# Altium PCB MCU_PCB_backup.PcbDoc
Units mm, origin at the board's own origin, x right, y up, seen from the top; angles counter-clockwise.
Board outline 70 x 90 mm, 4 copper layers (Top Layer, Ground Plane, Power Plane, Bottom Layer), stack 0.844 mm thick; 21 components, 34 nets, 174 pads, 40 vias.
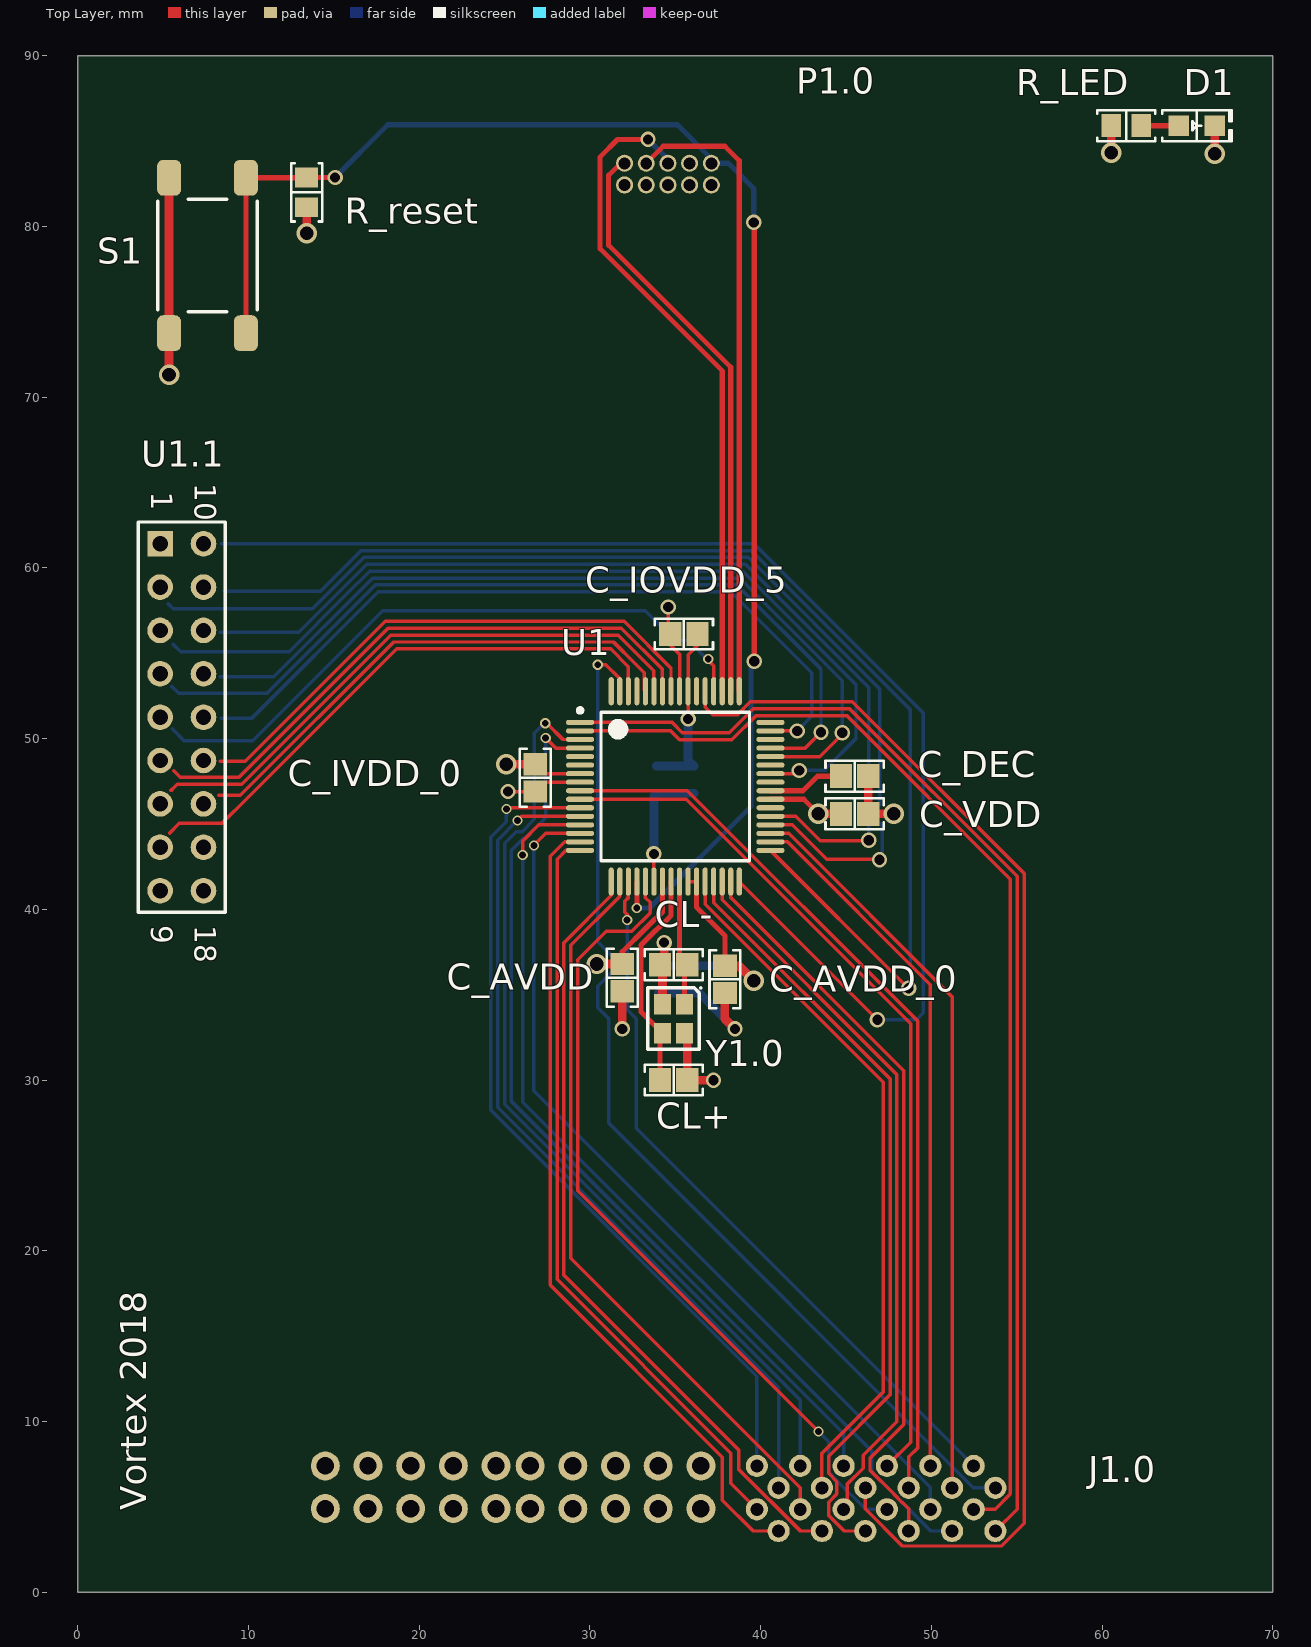
[diagram p0: Top Layer view]
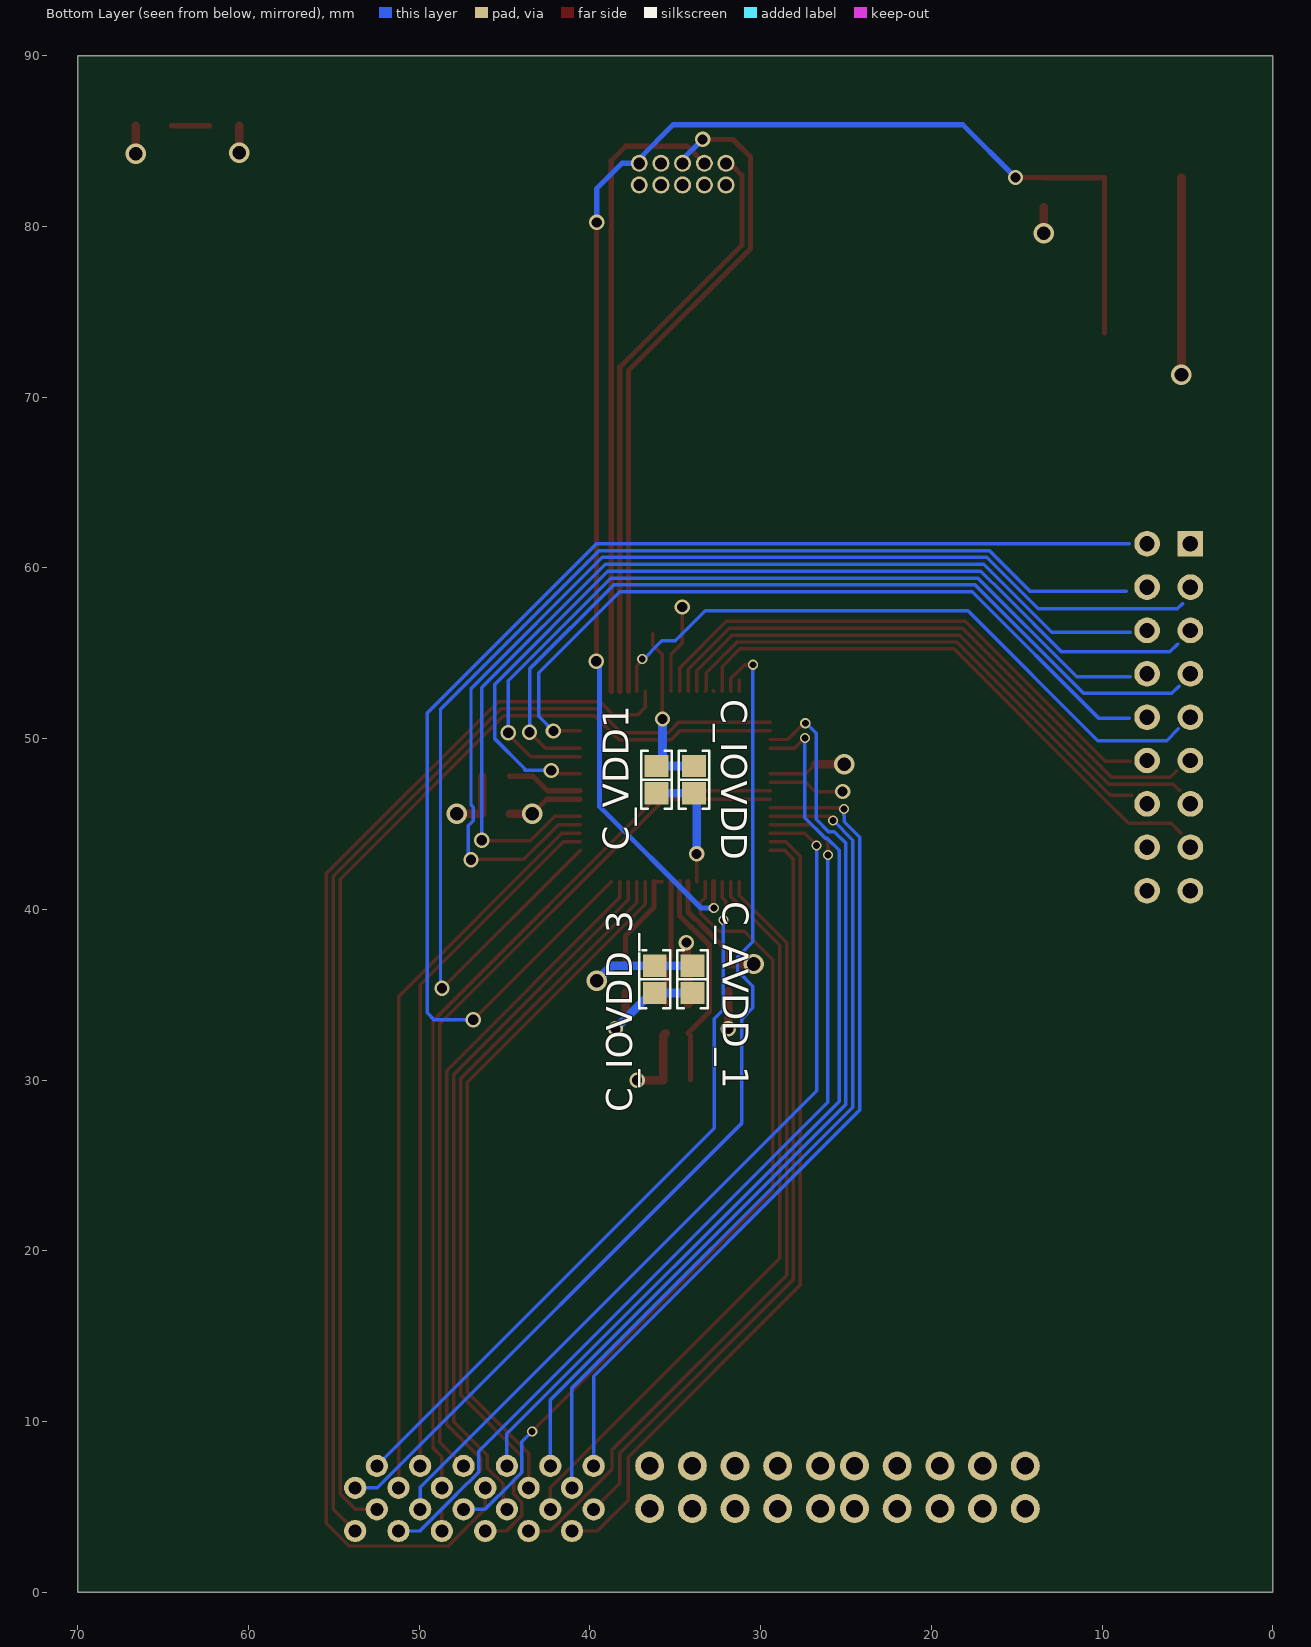
[diagram p1: Bottom Layer view, seen from below]
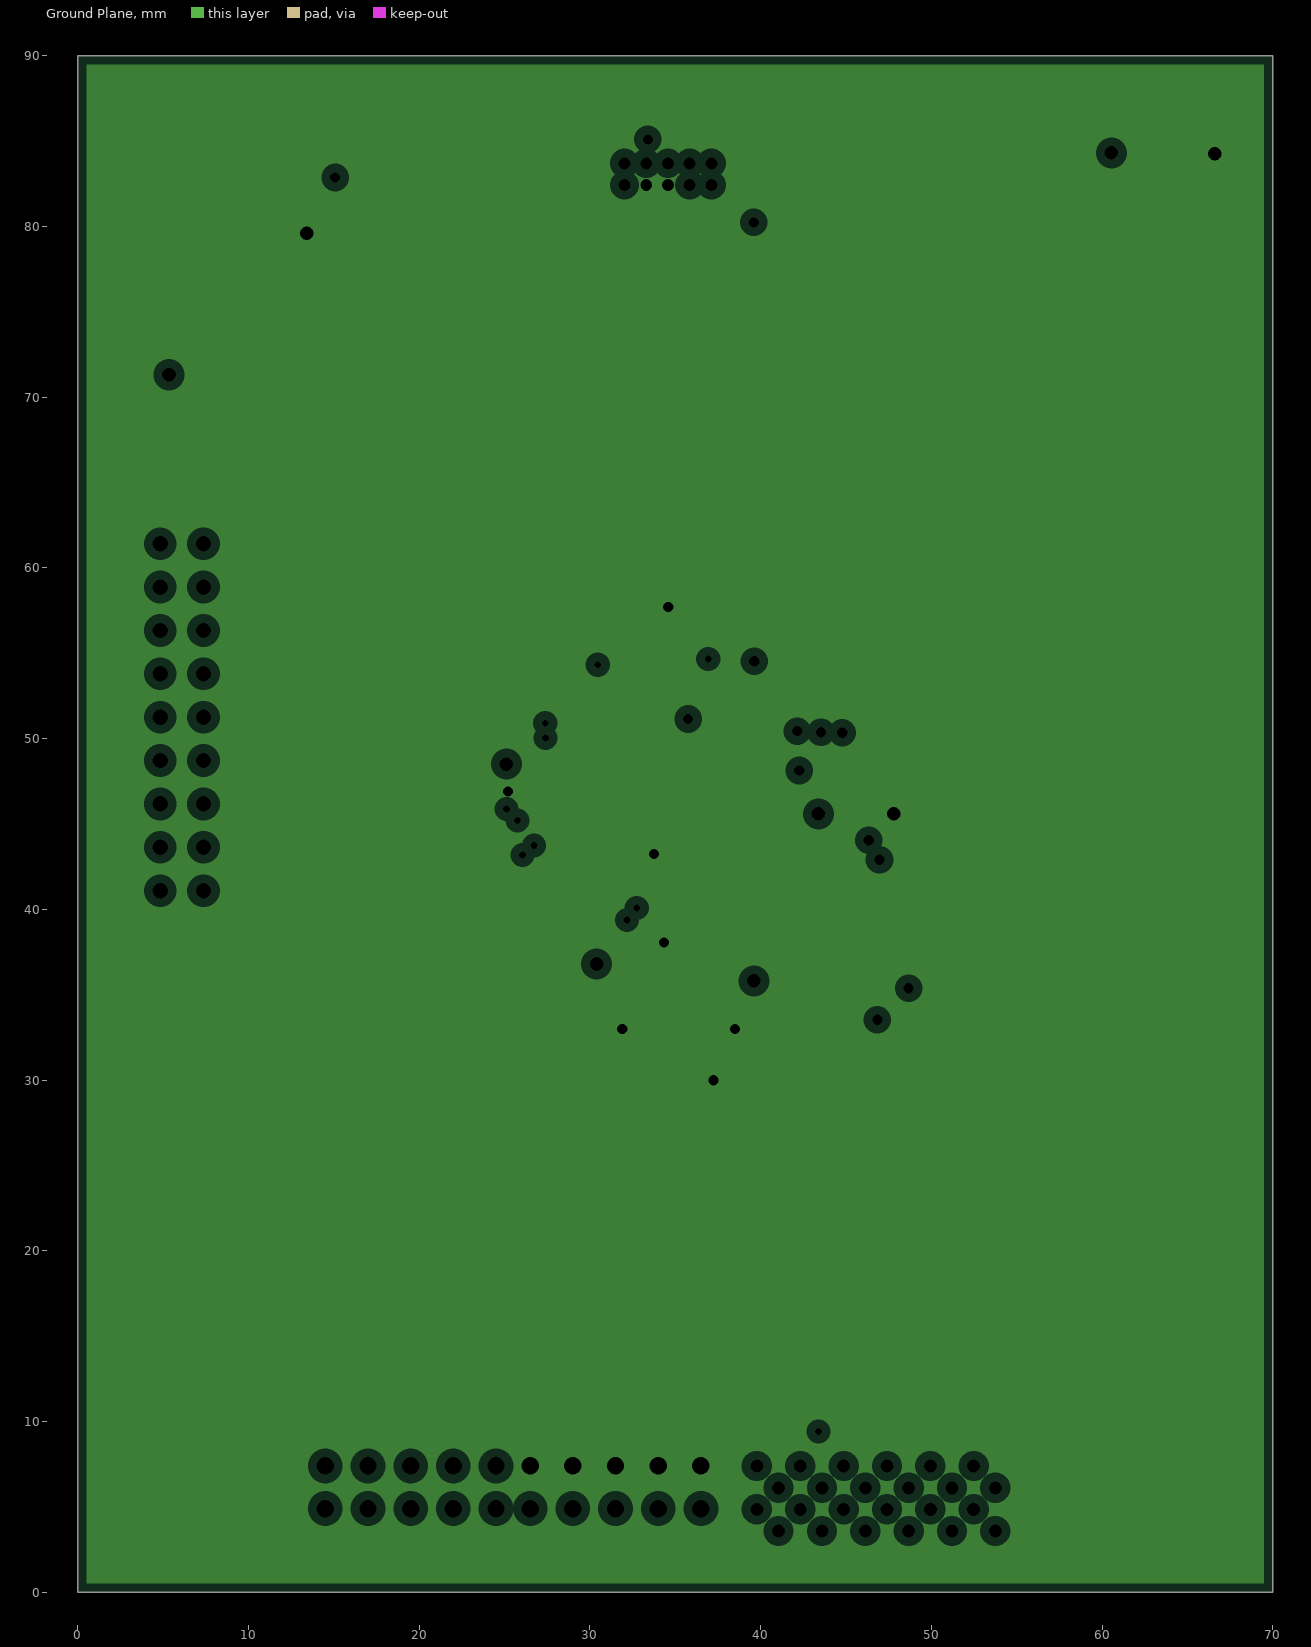
[diagram p2: Ground Plane, clearances drawn from the general rule]
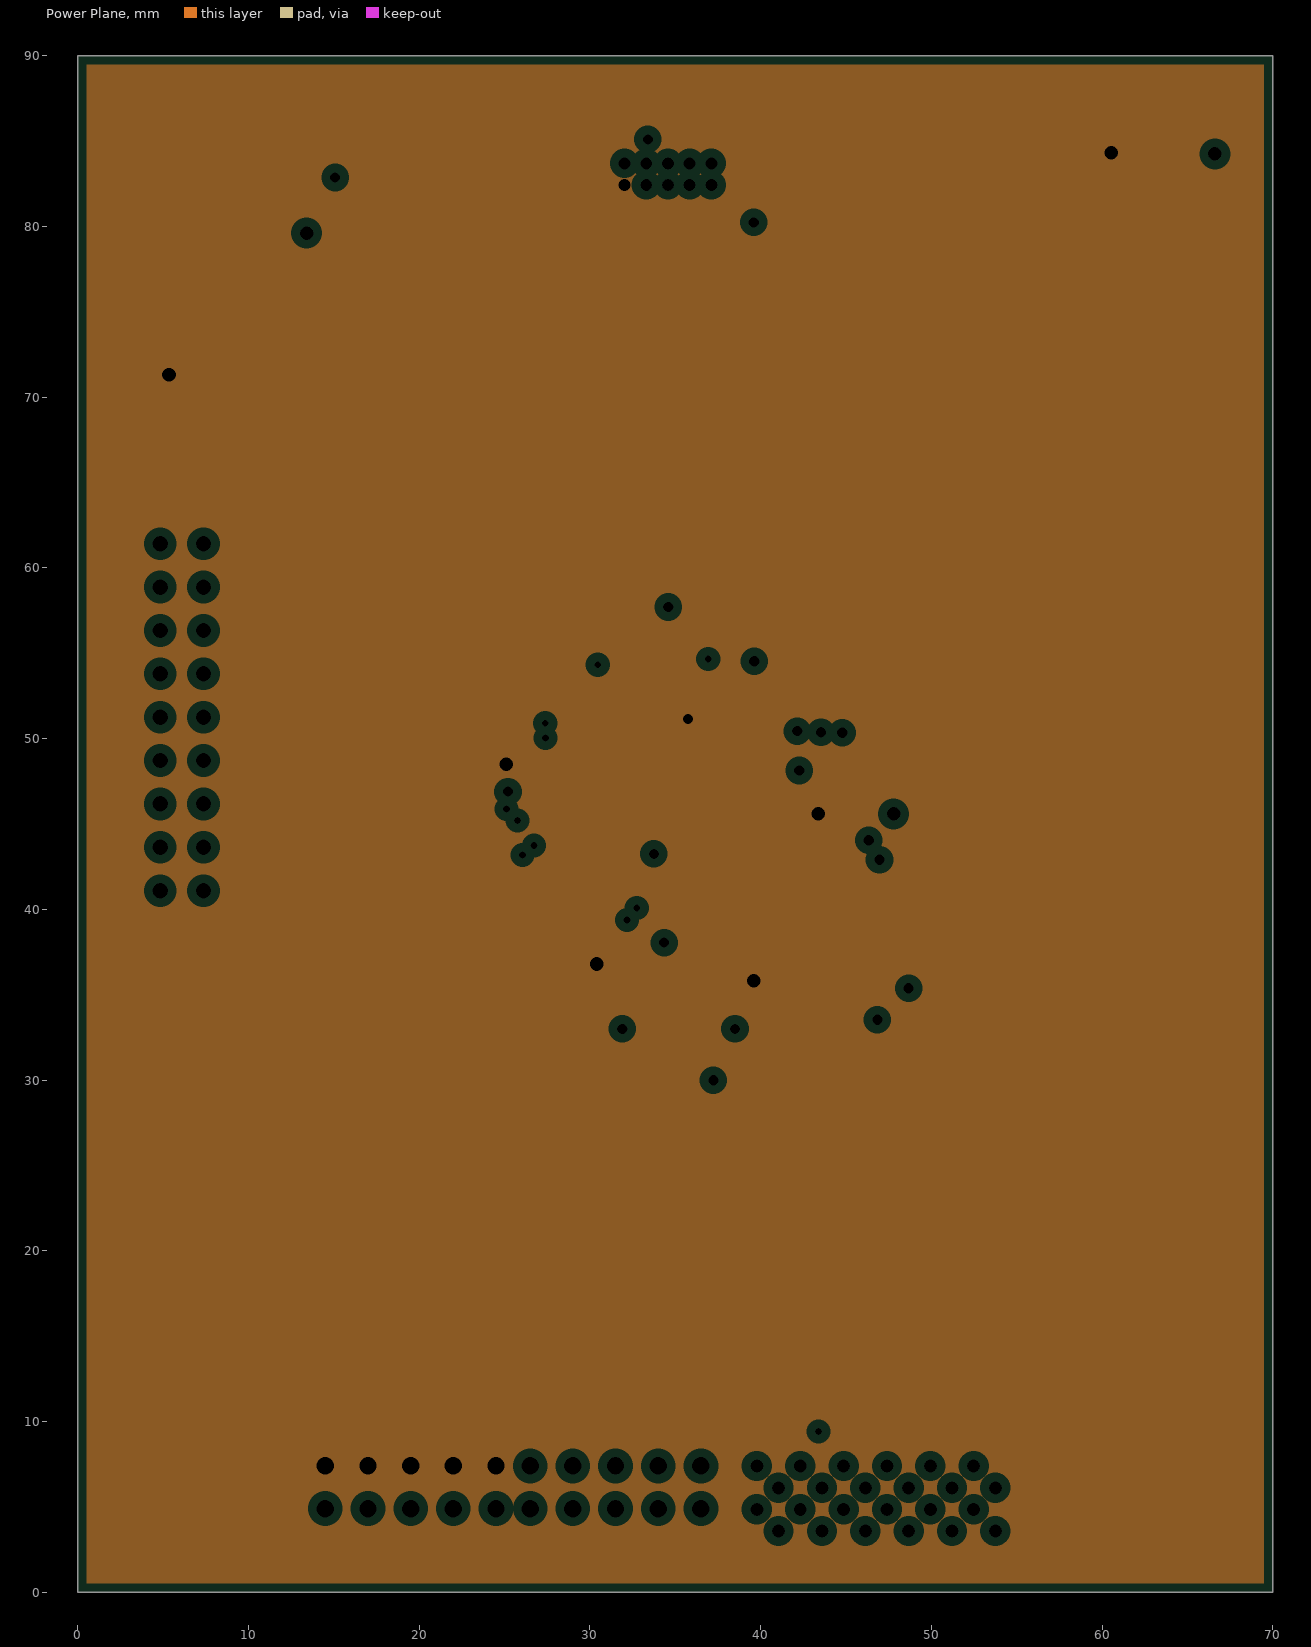
[diagram p3: Power Plane, clearances drawn from the general rule]
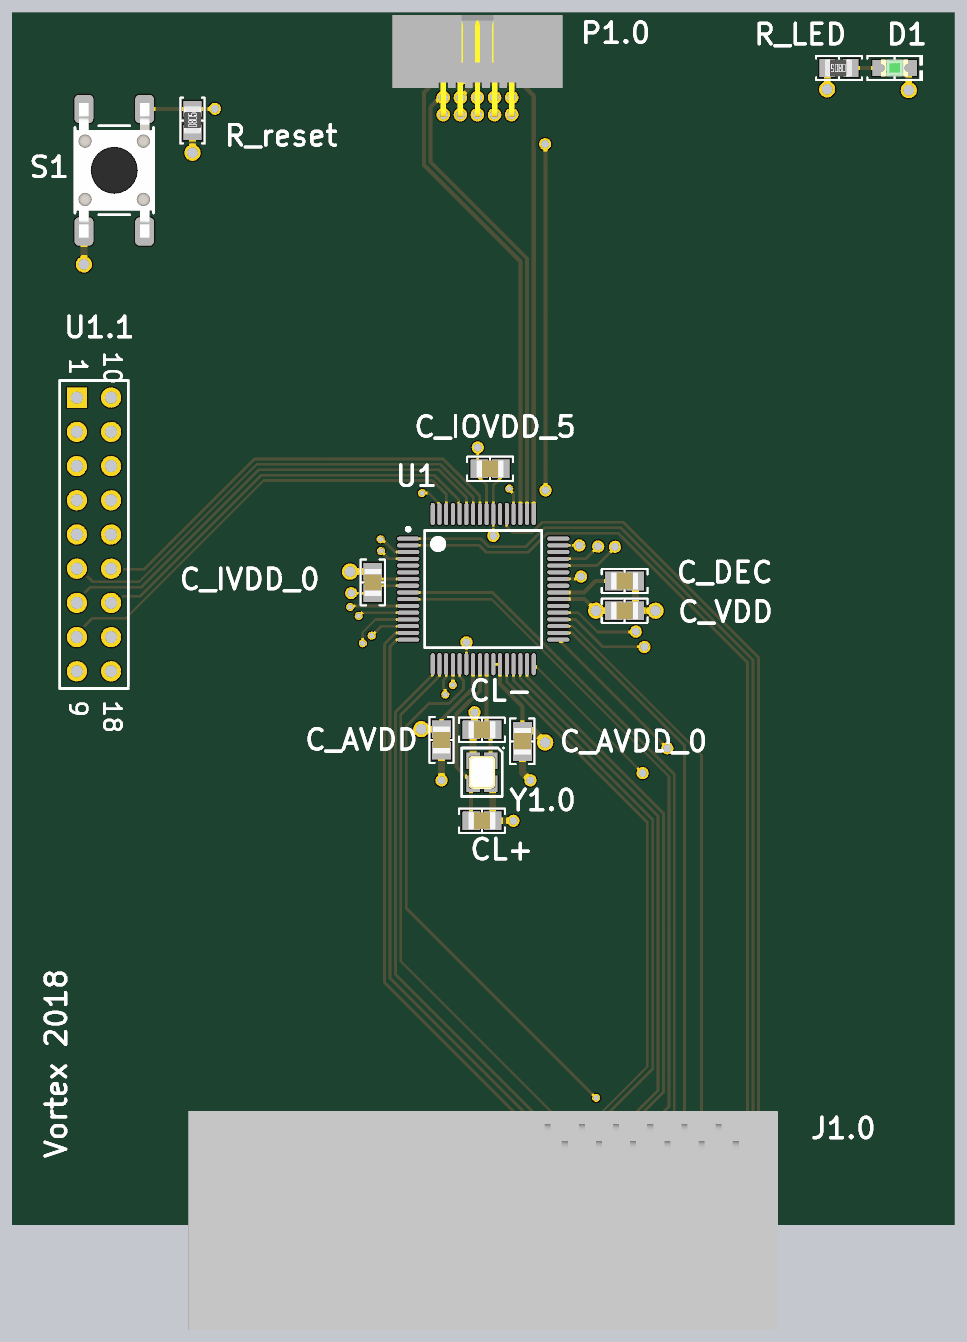
[diagram p4: 3D render of the assembled board from above, using the file's embedded part models]
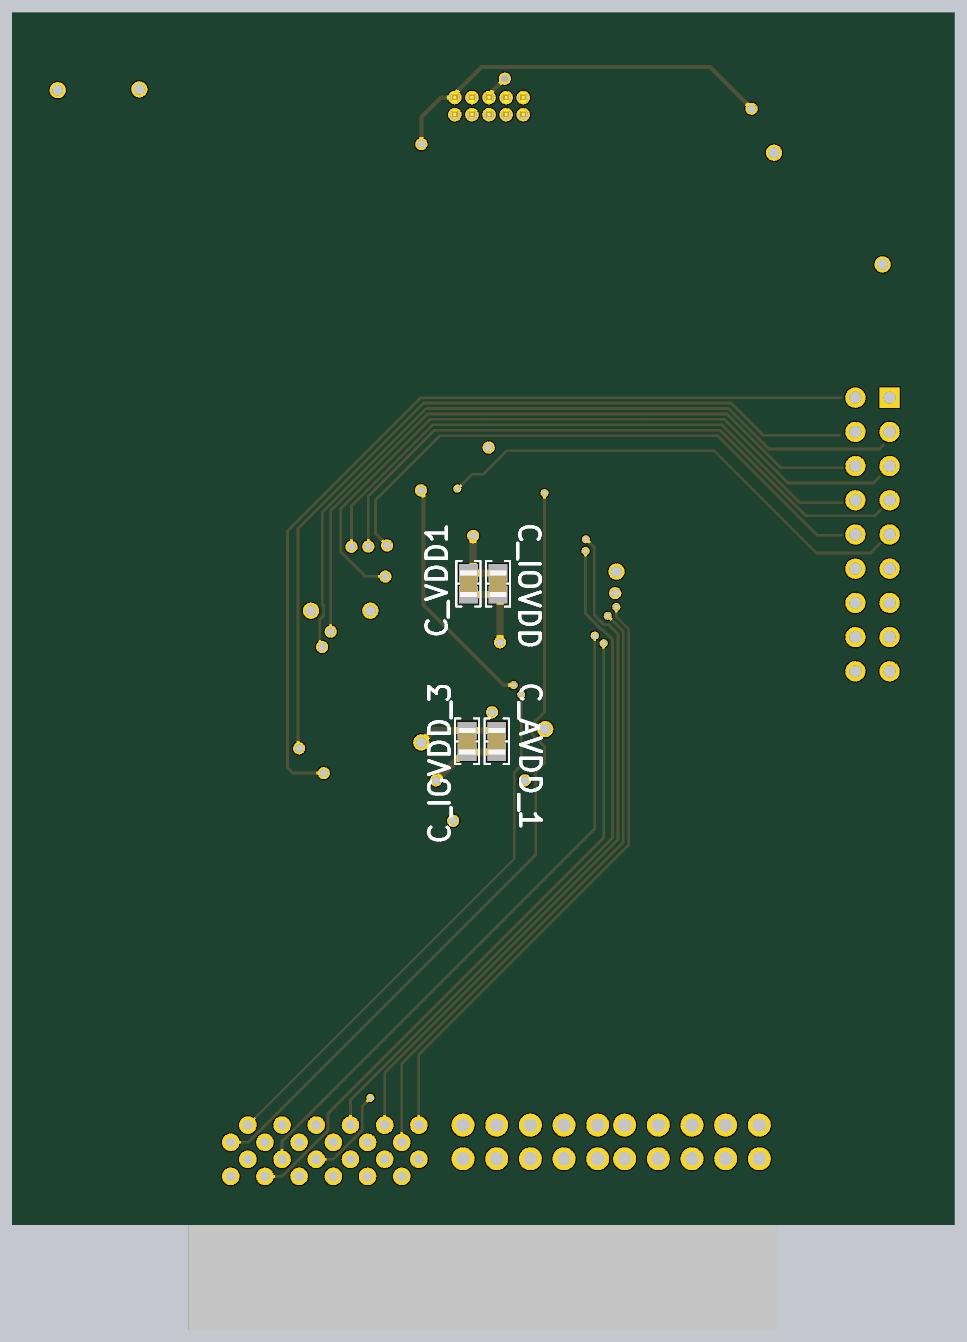
[diagram p5: 3D render of the assembled board from below, using the file's embedded part models]

## Layer stack, top to bottom
Top Solder: solder mask 0.0102, Solder Resist, Dk 3.5
Top Layer: signal copper 0.0356
Dielectric 1: core 0.32, FR-4, Dk 4.8
Ground Plane: plane copper 0.036, net GND
Dielectric 3: prepreg 0.127, Dk 4.2
Power Plane: plane copper 0.036, net VCC
Dielectric 4: core 0.254, Dk 4.2
Bottom Layer: signal copper 0.0356
Bottom Solder: solder mask 0.0102, Solder Resist, Dk 3.5

## Board outline
0,0 0,90 70,90 70,0

## Design rules (kind name [scope] priority, off if disabled: settings)
Clearance [All] p1: gap=0.254 ignorepadtopadclearanceinfootprint=FALSE except(0: Arc-Hole Track-Hole SMDPad-Hole THPad-Hole Via-Hole Fill-Hole Poly-Hole Region-Hole Text-Hole; 0.127: Arc-THPad Track-THPad; 0.152: Arc-SMDPad Track-SMDPad SMDPad-SMDPad; 0.2: Arc-Arc Arc-Track Track-Track)
PlaneClearance [All] p1: clearance=0.508
PlaneConnect [All] p1: planeconnectstyle=Relief reliefexpansion=0.508 reliefentries=4 reliefconductorwidth=0.254 reliefairgap=0.254
PolygonConnect [All] p1: connectstyle=Relief reliefconductorwidth=0.254 reliefentries=4 polygonreliefangle="90 Angle" airgapwidth=0.254
RoutingVias "Routing Via PWR" [(InNet('GND') OR InNet('VCC'))] p1: holewidth=0.8 width=1.2 viastyle="Through Hole" minholewidth=0.6 minwidth=0.9 maxholewidth=1 maxwidth=1.4
RoutingVias [All] p2: holewidth=0.6 width=0.9 viastyle="Through Hole" minholewidth=0.4 minwidth=0.6 maxholewidth=0.8 maxwidth=1.2
SolderMaskExpansion [All] p1: expansion=0.102
Width "Width PWR" [(InNet('GND') OR InNet('VCC'))] p1: maxlimit=0.762 minlimit=0.203 preferedwidth=0.508
Width [All] p2: maxlimit=0.356 minlimit=0.203 preferedwidth=0.3
28 further rules are at their usual default settings.

## Components (designator, comment, footprint, x,y, rotation, side; value= is the part's Value field where it differs from the comment)
C_AVDD "10uF" "CAP 0805/2012" 31.896,36 r90 top
C_AVDD_0 "10000pF" "CAP 0805/2012" 37.904,35.9 r270 top
C_AVDD_1 "10000pF" "CAP 0805/2012" 33.996,35.9 r270 bottom
C_DEC "1uF" "CAP 0805/2012" 45.5,47.8 r180 top
C_IOVDD "10uF" "CAP 0805/2012" 33.9,47.6 r90 bottom
C_IOVDD_3 "0.10uF" "CAP 0805/2012" 36.2,35.9 r90 bottom
C_IOVDD_5 "0.10uF" "CAP 0805/2012" 35.509,56.134 r0 top
C_IVDD_0 "0.10uF" "CAP 0805/2012" 26.8,47.7 r90 top
C_VDD "10uF" "CAP 0805/2012" 45.5,45.596 r180 top
C_VDD1 "0.10uF" "CAP 0805/2012" 36.104,47.6 r90 bottom
CL+ "10pF" "CAP 0805/2012" 34.9,30 r0 top
CL- "10pF" "CAP 0805/2012" 34.9,36.754 r0 top
D1 "Green" "LED 0805/2012 GREEN" 65.55,85.9 r0 top
J1.0 "0459854142" CONN_HEADER_4PWR_24SGL_2.36MM 53.75,3.59 r0 top
P1.0 "3220-10-0200-00" HDRRA10W40P127_2X5_1265X750X540P 32.03,82.43 r0 top
R_LED "130" "RES 0805/2012" 61.414,85.9 r180 top
R_reset "10k" "RES 0805/2012" 13.411,81.991 r90 top
S1 "FSM4JSMATR" "TE FSM4JSMA" 7.6,78.3 r0 top
U1 "EFM32GG942F1024G-E-QFP64" TQFP64_N 35,47.2 r0 top
U1.1 "Comment" HDR2X9_CEN 4.826,61.417 r270 top
Y1.0 "16MHz" "NDK NX2520SA" 34.9,33.6 r270 top

## Footprints (in the part's own frame and the unit in brackets; to place one, negate y for a bottom-side part, rotate by r counter-clockwise, add the part's x,y. Pads: shape width x height; smd on the part's side, far side on the other; paste and mask are expansions set on the pad)
"CAP 0805/2012" [mm] "Chip Capacitor, 2-Leads, Body 2.00x1.20mm, IPC Medium Density"
  rect 1.3x1.4 smd: 1(-0.8,0) 2(0.8,0)
  silkscreen extent -1.7,-0.9 1.7,0.9, body extent -1,-0.64 1,0.64, height 1.26
CONN_HEADER_4PWR_24SGL_2.36MM [mm]
  round 1.3 hole 0.76 unplated: 1(0,0) 2(-1.27,1.27) 3(-2.54,0) 4(-3.81,1.27) 5(-5.08,0) 6(-6.35,1.27) 7(-7.62,0) 8(-8.89,1.27) 9(-10.16,0) 10(-11.43,1.27) 11(-12.7,0) 12(-13.97,1.27) 13(0,2.53) 14(-1.27,3.81) 15(-2.54,2.53) 16(-3.81,3.81) 17(-5.08,2.53) 18(-6.35,3.81) 19(-7.62,2.53) 20(-8.89,3.81) 21(-10.16,2.53) 22(-11.43,3.81) 23(-12.7,2.53) 24(-13.97,3.81)
  round 1.7 hole 1.02 unplated: P1A(-27.25,1.31) P1A(-24.75,1.31) P1A(-22.25,1.31) P1A(-19.75,1.31) P1A(-17.25,1.31) P1B(-27.25,3.81) P1B(-24.75,3.81) P1B(-22.25,3.81) P1B(-19.75,3.81) P1B(-17.25,3.81) P2A(-39.25,1.31) P2A(-36.75,1.31) P2A(-34.25,1.31) P2A(-31.75,1.31) P2A(-29.25,1.31) P2B(-39.25,3.81) P2B(-36.75,3.81) P2B(-34.25,3.81) P2B(-31.75,3.81) P2B(-29.25,3.81)
  body extent -40.65,-11.41 3.13,4.87, height 7.49
HDR2X9_CEN [mm] "Connector; Header; 9x2 Position"
  rect 1.5x1.5 hole 0.9: 1(0,0)
  round 1.5 hole 0.9: 2(2.54,0) 3(5.08,0) 4(7.62,0) 5(10.16,0) 6(12.7,0) 7(15.24,0) 8(17.78,0) 9(20.32,0) 10(0,2.54) 11(2.54,2.54) 12(5.08,2.54) 13(7.62,2.54) 14(10.16,2.54) 15(12.7,2.54) 16(15.24,2.54) 17(17.78,2.54) 18(20.32,2.54)
  silkscreen extent -1.27,-1.27 21.59,3.81
HDRRA10W40P127_2X5_1265X750X540P [mm]
  round 1 hole 0.7: 1(0,0) 2(0,1.27) 3(1.27,0) 4(1.27,1.27) 5(2.54,0) 6(2.54,1.27) 7(3.81,0) 8(3.81,1.27) 9(5.08,0) 10(5.08,1.27)
  body extent -3.78,-0.18 8.87,7.39, height 5.18
"LED 0805/2012 GREEN" [mm] "Chip Diode, 2-Leads, Body 2.00x1.25mm, IPC Medium Density"
  rect 1.2x1.2 smd: 1(-1.05,0) 2(1.05,0)
  silkscreen extent -2.03,-0.9 2.03,0.9, body extent -1,-0.62 1,0.63, height 0.9
"NDK NX2520SA" [mm] "Crystal, 4-Leads, Body 2.00x2.50mm, Pitch 1.70mm, IPC Medium Density"
  rect 1.2x1 smd: 1(-0.85,0.65) 2(-0.85,-0.65) 3(0.85,-0.65) 4(0.85,0.65)
  silkscreen extent -1.85,-1.5 1.8,1.65, body extent -1.26,-1.01 1.26,1.01, height 0.5
"RES 0805/2012" [mm] "Chip Resistor, 2-Leads, Body 2.00x1.25mm, IPC Medium Density"
  rect 1.15x1.35 smd: 1(-0.875,0) 2(0.875,0)
  silkscreen extent -1.7,-0.9 1.7,0.9, body extent -0.95,-0.62 1.05,0.63, height 0.6
"TE FSM4JSMA" [mm]
  rrect50% 1.4x2.1 smd: 1(2.25,4.55) 2(2.25,-4.55) 3(-2.25,4.55) 4(-2.25,-4.55)
  silkscreen extent -2.92,-3.3 2.92,3.3, body extent -3,-5 3,5, height 5.08
TQFP64_N [mm]
  oval 1.65x0.3 smd: 1(-5.575,3.75) 2(-5.575,3.25) 3(-5.575,2.75) 4(-5.575,2.25) 5(-5.575,1.75) 6(-5.575,1.25) 7(-5.575,0.75) 8(-5.575,0.25) 9(-5.575,-0.25) 10(-5.575,-0.75) 11(-5.575,-1.25) 12(-5.575,-1.75) 13(-5.575,-2.25) 14(-5.575,-2.75) 15(-5.575,-3.25) 16(-5.575,-3.75) 33(5.575,-3.75) 34(5.575,-3.25) 35(5.575,-2.75) 36(5.575,-2.25) 37(5.575,-1.75) 38(5.575,-1.25) 39(5.575,-0.75) 40(5.575,-0.25) 41(5.575,0.25) 42(5.575,0.75) 43(5.575,1.25) 44(5.575,1.75) 45(5.575,2.25) 46(5.575,2.75) 47(5.575,3.25) 48(5.575,3.75)
  oval 0.3x1.65 smd: 17(-3.75,-5.575) 18(-3.25,-5.575) 19(-2.75,-5.575) 20(-2.25,-5.575) 21(-1.75,-5.575) 22(-1.25,-5.575) 23(-0.75,-5.575) 24(-0.25,-5.575) 25(0.25,-5.575) 26(0.75,-5.575) 27(1.25,-5.575) 28(1.75,-5.575) 29(2.25,-5.575) 30(2.75,-5.575) 31(3.25,-5.575) 32(3.75,-5.575) 49(3.75,5.575) 50(3.25,5.575) 51(2.75,5.575) 52(2.25,5.575) 53(1.75,5.575) 54(1.25,5.575) 55(0.75,5.575) 56(0.25,5.575) 57(-0.25,5.575) 58(-0.75,5.575) 59(-1.25,5.575) 60(-1.75,5.575) 61(-2.25,5.575) 62(-2.75,5.575) 63(-3.25,5.575) 64(-3.75,5.575)
  silkscreen extent -5.7,-4.35 4.35,4.57, body extent -5,-5 5,5, height 1.2

## Part data
C_AVDD C_IOVDD C_VDD: library part JMK212BJ106KD-T, "CAP CER 10UF 6.3V X5R 0805", Device Package="0805 (2012 Metric)", Manufacturer="Taiyo Yuden", Supplier Part Number 1=587-1304-2-ND, TemperatureCoefficient=X5R, TemperatureRange="-55C ~ 85C", Tolerance=10%, Voltage=6.3V, ComponentLink1Description=Datasheet, ComponentLink1URL=http://www.yuden.co.jp/productdata/catalog/en/mlcc_all_e.pdf, ComponentLink2Description="Digi-Key Listing", ComponentLink2URL=https://www.digikey.com/product-detail/en/taiyo-yuden/JMK212BJ106KD-T/587-1304-2-ND/930656, PartId=13750, Part Number=JMK212BJ106KD-T, Price=0,032, Supplier 1=Digi-Key
C_AVDD_0 C_AVDD_1: library part CC0805JRX7R9BB103, "CAP CER 10000PF 50V X7R 0805", Device Package="0805 (2012 Metric)", Manufacturer=Yageo, Supplier Part Number 1=311-1857-2-ND, TemperatureCoefficient=X7R, TemperatureRange="-55C ~ 125C", Tolerance=5%, Voltage=50V, ComponentLink1Description=Datasheet, ComponentLink1URL=http://www.yageo.com/documents/recent/UPY-GPHC_X7R_6.3V-to-50V-v12.pdf, ComponentLink2Description="Digi-Key listing", ComponentLink2URL=http://digikey.com/product-detail/en/CC0805JRX7R9BB103/311-1857-2-ND/5195264, PartId=5807, Part Number=CC0805JRX7R9BB103, Price=0,0193, Supplier 1=Digi-Key, Type=-
C_DEC: library part GRM219R71E105KA88D, "CAP CER 1UF 25V X7R 0805", Device Package="0805 (2012 Metric)", Manufacturer="Murata Electronics North America", Supplier Part Number 1=490-5899-2-ND, TemperatureCoefficient=X7R, TemperatureRange="-55C ~ 125C", Tolerance=10%, Voltage=25V, ComponentLink1Description=Datasheet, ComponentLink1URL=http://www.murata.com/~/media/webrenewal/support/library/catalog/products/capacitor/mlcc/c02e.pdf, ComponentLink2Description="Digi-Key Listing", ComponentLink2URL=https://www.digikey.com/product-detail/en/murata-electronics-north-america/GRM219R71E105KA88D/490-5899-2-ND/2546469, PartId=14171, Part Number=GRM219R71E105KA88D, Price=0,0422, Supplier 1=Digi-Key
C_IOVDD_3 C_IOVDD_5 C_IVDD_0 C_VDD1: library part GRM21BR71E104KA01L, "CAP CER 0.1UF 25V X7R 0805", Device Package="0805 (2012 Metric)", Manufacturer="Murata Electronics North America", Supplier Part Number 1=490-1673-2-ND, TemperatureCoefficient=X7R, TemperatureRange="-55C ~ 125C", Tolerance=10%, Voltage=25V, ComponentLink1Description=Datasheet, ComponentLink1URL=http://www.murata.com/~/media/webrenewal/support/library/catalog/products/capacitor/mlcc/c02e.pdf, ComponentLink2Description="Digi-Key Listing", ComponentLink2URL=https://www.digikey.com/product-detail/en/murata-electronics-north-america/GRM21BR71E104KA01L/490-1673-2-ND/586699, PartId=13708, Part Number=GRM21BR71E104KA01L, Price=0,0092, Supplier 1=Digi-Key
CL+ CL-: library part C0805C100J1GACTU, "CAP CER 10PF 100V NP0 0805", Device Package="0805 (2012 Metric)", Manufacturer=Kemet, Supplier Part Number 1=399-1109-2-ND, TemperatureCoefficient="C0G, NP0", TemperatureRange="-55C ~ 125C", Tolerance=5%, Voltage=100V, ComponentLink1Description=Datasheet, ComponentLink1URL=http://www.kemet.com/docfinder?Partnumber=C0805C100J1GACTU, ComponentLink2Description="Digi-Key Listing", ComponentLink2URL=https://www.digikey.com/product-detail/en/kemet/C0805C100J1GACTU/399-1109-2-ND/411108, PartId=14386, Part Number=C0805C100J1GACTU, Price=0,0236, Supplier 1=Digi-Key
D1: library part LTST-C171KGKT, "LED GREEN CLEAR 0805 SMD", Current (Test)=20mA, Device Package="0805 (2012 Metric)", Manufacturer="Lite-On Inc.", Supplier Part Number 1=160-1426-2-ND, Voltage Forward=2V, Colour=Green, ComponentLink1Description=Datasheet, ComponentLink1URL=http://optoelectronics.liteon.com/upload/download/DS22-2000-118/S_110_LTST-C171KGKT.pdf, ComponentLink2Description="Digi-Key Listing", ComponentLink2URL=http://www.digikey.ca/product-detail/en/LTST-C171KGKT/160-1426-2-ND/386799, Lens Transparency=Clear, Millicandela=35mcd, PartId=7080, Part Number=LTST-C171KGKT, Price=0,0638, Supplier 1=Digi-Key, Type="Surface Mount", Viewing Angle=130
J1.0: Supplier Part Number 1=WM8736-ND, ComponentLink1Description="Manufacturer Link", ComponentLink1URL=http://www.molex.com/, ComponentLink2Description=Datasheet, ComponentLink2URL=http://www.molex.com/pdm_docs/sd/459854111_sd.pdf, Mounting Type="Through Hole", Number Of Positions=28, Number Of Rows=2, Part Number=0459854142, Supplier 1=Digi-Key
P1.0: Supplier Part Number 1=1175-1628-ND, ComponentLink1Description="Manufacturer Link", ComponentLink1URL=http://www.cnctech.us/, ComponentLink2Description=Datasheet, ComponentLink2URL=http://cnctech.us/pdfs/3220-XX-0200-00.pdf, Mounting Type="Through Hole", Number Of Positions=10, Number Of Rows=2, Part Number=3220-10-0200-00, Supplier 1=Digi-Key
R_LED: library part ERJ-6ENF1300V, "RES SMD 130 OHM 1% 1/8W 0805", Device Package="0805 (2012 Metric)", Manufacturer="Panasonic Electronic Components", PowerRating="0.125W, 1/8W", Supplier Part Number 1=P130CTR-ND, TemperatureCoefficient=100ppm/C, TemperatureRange="-55C ~ 155C", Tolerance=1%, ComponentLink1Description=Datasheet, ComponentLink1URL=http://industrial.panasonic.com/www-cgi/jvcr13pz.cgi?E+PZ+3+AOA0002+ERJ6ENF1300V+7+WW, ComponentLink2Description="Digi-Key listing", ComponentLink2URL=http://digikey.com/product-detail/en/ERJ-6ENF1300V/P130CTR-ND/111111, PartId=2345, Part Number=ERJ-6ENF1300V, Price=0,0073, Supplier 1=Digi-Key, Type="Thick Film"
R_reset: library part ERJ-6ENF1002V, "RES SMD 10K OHM 1% 1/8W 0805", Device Package="0805 (2012 Metric)", Manufacturer="Panasonic Electronic Components", PowerRating="0.125W, 1/8W", Supplier Part Number 1=P10.0KCTR-ND, TemperatureCoefficient=100ppm/C, TemperatureRange="-55C ~ 155C", Tolerance=1%, ComponentLink1Description=Datasheet, ComponentLink1URL=http://industrial.panasonic.com/www-cgi/jvcr13pz.cgi?E+PZ+3+AOA0002+ERJ6ENF1002V+7+WW, ComponentLink2Description="Digi-Key listing", ComponentLink2URL=http://digikey.com/product-detail/en/ERJ-6ENF1002V/P10.0KCTR-ND/111474, PartId=1947, Part Number=ERJ-6ENF1002V, Price=0,0073, Supplier 1=Digi-Key, Type="Thick Film"
S1: "SWITCH TACTILE SPST-NO 0.05A 24V", Contact Rating @ Voltage="0.05A @ 24VDC", Illumination Type, Colour=-, Manufacturer="TE Connectivity Alcoswitch Switches", Operating Force=160gf, Operating Temperature="-35C ~ 85C", Supplier Part Number 1=450-1759-2-ND, Actuator Orientation="Top Actuated", Actuator Type=Standard, Circuit=SPST-NO, ComponentLink1Description=Datasheet, ComponentLink1URL=http://www.te.com/commerce/DocumentDelivery/DDEController?Action=srchrtrv&DocNm=2-1437565-7&DocType=Customer+Drawing&DocLang=English, ComponentLink2Description="Digi-Key Listing", ComponentLink2URL=http://www.digikey.com/product-detail/en/FSM4JSMATR/450-1759-2-ND/529675, Illumination=Non-Illuminated, Illumination Voltage=-, Mechanical Life="100,000 Cycles", PartId=8249, Part Number=FSM4JSMATR, Price=0,128, Supplier 1=Digi-Key, Switch Function=Off-Mom, Switch Travel=0.25mm
U1: Supplier Part Number 1=336-4157-ND, ComponentLink1Description="Manufacturer Link", ComponentLink1URL=https://www.silabs.com, ComponentLink2Description=Datasheet, ComponentLink2URL=https://www.silabs.com/documents/public/data-sheets/EFM32GG942.pdf, Part Number=EFM32GG942F1024G-E-QFP64, Supplier 1=Digi-Key
U1.1: library part EFM32GG942F1024G-E-QFP64
Y1.0: library part NX2520SA-16.000000MHZ, "CRYSTAL 16.0000MHZ 10PF SMD", Device Package="4-SMD, No Lead (DFN, LCC)", Frequency Stability=10ppm, Load Capacitance=10pF, Manufacturer=NDK, Operating Mode=Fundamental, Supplier Part Number 1=644-1059-2-ND, ComponentLink1Description=Datasheet, ComponentLink1URL=http://media.digikey.com/pdf/Data%20Sheets/NDK%20PDFs/NX2520SA.pdf, ComponentLink2Description="Digi-Key Listing", ComponentLink2URL=http://www.digikey.com/product-detail/en/NX2520SA-16.000000MHZ/644-1059-2-ND/1128841, ESR="80 Ohm", Frequency=16MHz, Frequency Tolerance=10ppm, PartId=8496, Part Number=NX2520SA-16.000000MHZ, Price=0,7336, Supplier 1=Digi-Key, Type="MHz Crystal"

## Via types
v1: diameter 0.9, hole 0.6, Top Layer to Bottom Layer, 20 vias
v2: diameter 0.6, hole 0.4, Top Layer to Bottom Layer, 11 vias
v3: diameter 1.2, hole 0.8, Top Layer to Bottom Layer, 9 vias

## Nets (pads, with @x,y where several pads share a name; then routed paths per layer and width w, separated by ;. In a path a pad name is that pad's centre, name@x,y a point inside that pad or via, vN(x,y) a via of type N, cw(c..) or ccw(c..) an arc to the next point about the centre after c; other vN are vias at no path point)
CLK+: CL+.1 U1.24 Y1.0.3 | length 12.9
  Top Layer w0.3: CL+.1 34.1,32.6 Y1.0.3 33,34 33,37.915 33.789,38.704 34.013,38.929 34.048,38.929 34.75,39.631 34.75,40.135 U1.24
CLK-: CL-.2 U1.25 Y1.0.1 | length 7.4
  Top Layer w0.3: U1.25 35.25,37.204 CL-.2 35.55,36.604 Y1.0.1
GND: C_AVDD.1 C_AVDD_0.2 C_AVDD_1.2 C_DEC.1 C_IOVDD.1 C_IOVDD_3.1 C_IOVDD_5.1 C_IVDD_0.1 C_VDD1.1 C_VDD.1 CL+.2 CL-.1 D1.2 J1.0.P1B P1.0.3 P1.0.5 R_reset.1 U1.8 U1.22 U1.56 Y1.0.2 Y1.0.4 | length 42.1
  Top Layer w0.203: v1(25.2,46.9) C_IVDD_0.1 27.35,47.45 U1.8 ; U1.22 v1(33.75,43.25) ; v1(34.595,57.709) 34.595,55.604 35.25,54.949 U1.56
  Top Layer w0.508: v3(13.411,79.604) R_reset.1 ; C_AVDD.1 31.896,33.004 v1(31.9,33) ; v1@34.234,38.054 v1(34.346,38.054) 34.346,37.001 CL-.1 34.25,36.604 Y1.0.2 ; Y1.0.4 35.7,32.6 CL+.2 35.703,29.997 v1(37.236,29.997) ; C_AVDD_0.2 37.904,33.596 v1(38.5,33) ; C_DEC.1 C_VDD.1 v3(47.796,45.596) ; v3(66.6,84.251) D1.2
  Bottom Layer w0.508: v1(33.75,43.25) 33.75,46.65 C_IOVDD.1 C_VDD1.1 ; C_AVDD_1.2 C_IOVDD_3.1 36.4,35.1 v1(38.5,33)
GPIO0: J1.0.19 U1.53 | length 74.3
  Top Layer w0.203: U1.53 36.754,52.771 36.754,51.841 37.186,51.41 38.648,51.41 39.399,52.16 45.373,52.16 55.435,42.098 55.435,4.032 54.121,2.718 54.121,2.711 48.306,2.711 46.13,4.887 J1.0.19
GPIO1: J1.0.20 U1.4 | length 53.8
  Top Layer w0.203: v2(27.407,50.038) 27.995,49.45 U1.4
  Bottom Layer w0.203: v2(27.407,50.038) 27.407,45.366 26.194,44.153 26.106,44.153 25.405,43.452 25.405,28.748 44.86,9.293 J1.0.20
GPIO2: J1.0.21 U1.28 | length 41.3
  Top Layer w0.203: U1.28 36.75,40.288 47.175,29.863 47.175,11.728 43.578,8.131 43.578,6.132 J1.0.21
GPIO3: J1.0.22 U1.3 | length 54.3
  Top Layer w0.203: v2(27.381,50.902) 27.47,50.902 28.422,49.95 U1.3
  Bottom Layer w0.203: v2@27.362,50.921 26.751,50.31 26.751,45.28 26.027,44.556 25.685,44.556 25.002,43.873 25.002,28.581 42.32,11.263 J1.0.22
GPIO4: J1.0.23 U1.12 | length 50.2
  Top Layer w0.203: v2(25.756,45.212) 25.994,45.45 U1.12
  Bottom Layer w0.203: v2(25.756,45.212) 24.598,44.055 24.598,28.414 41.05,11.962 J1.0.23
GPIO5: J1.0.24 U1.11 | length 49.6
  Top Layer w0.203: v2(25.121,45.872) 25.197,45.949 29.424,45.949 U1.11
  Bottom Layer w0.203: v2(25.121,45.872) 25.121,45.504 25.1,45.484 25.1,45.127 24.195,44.222 24.195,28.247 39.78,12.662 J1.0.24
NetC_DEC_2: C_DEC.2 U1.40 | length 4.5
  Top Layer w0.3: U1.40 42.48,46.95 43.33,47.8 C_DEC.2
NetD1_1: D1.1 R_LED.1 | length 2.2
  Top Layer w0.3: R_LED.1 D1.1
PWM8: J1.0.13 U1.63 | length 61.7
  Top Layer w0.203: v2(30.455,54.331) 30.937,54.331 30.937,54.334 31.75,53.521 U1.63
  Bottom Layer w0.203: v2(30.455,54.331) 30.455,38.096 31.355,37.196 31.355,36.404 30.455,35.504 30.455,34.249 31.094,33.609 31.094,27.488 52.463,6.12 J1.0.13
PWM9: J1.0.14 U1.19 | length 42.8
  Top Layer w0.203: v2(32.182,39.37) 32.182,39.7 32.044,39.838 32.044,40.48 32.258,40.693 32.258,41.617 U1.19
  Bottom Layer w0.203: v2(32.182,39.37) 32.182,34.118 32.706,33.594 32.706,27.174 J1.0.14
RESETn: P1.0.10 R_reset.2 S1.1 S1.2 U1.20 | length 88.9
  Top Layer w0.3: S1.2 S1.1 13.395,82.85 R_reset.2 v1(15.074,82.866) ; v2(32.741,40.081) 32.75,40.091 U1.20 ; v1(39.599,80.239) 39.624,80.213 v1(39.624,54.534)
  Bottom Layer w0.3: v1(15.074,82.866) 18.161,85.954 35.128,85.954 37.11,83.972 P1.0.10 38.118,83.7 39.599,82.22 v1(39.599,80.239) ; v2(32.741,40.081) 33.489,40.081 39.446,46.038 39.446,54.534 v1(39.624,54.534)
Rx1: J1.0.15 U1.35 | length 43.4
  Top Layer w0.203: U1.35 41.642,44.45 51.21,34.882 J1.0.15
Rx2: J1.0.17 U1.9 | length 52.9
  Top Layer w0.203: U1.9 35.702,46.95 49.191,33.46 49.191,8.45 48.67,7.928 J1.0.17
SCL1: J1.0.2 U1.2 | length 68.5
  Top Layer w0.203: U1.2 34.74,50.45 35.249,49.941 38.32,49.941 39.733,51.354 45.039,51.354 54.629,41.764 54.629,5.756 53.733,4.86 J1.0.2
SCL2: J1.0.4 U1.14 | length 51.5
  Top Layer w0.203: v2(26.721,43.739) 26.721,43.764 27.407,44.45 U1.14
  Bottom Layer w0.203: v2(26.721,43.739) 26.721,29.377 49.94,6.157 J1.0.4
SDA1: J1.0.1 U1.1 | length 69.4
  Top Layer w0.203: U1.1 34.811,50.95 35.416,50.344 38.153,50.344 39.566,51.757 45.206,51.757 55.032,41.931 55.032,4.872 J1.0.1
SDA2: J1.0.3 U1.13 | length 55.3
  Top Layer w0.203: v2(26.06,43.18) 26.06,44.006 27.005,44.95 U1.13
  Bottom Layer w0.203: v2(26.06,43.18) 26.06,28.712 46.521,8.251 46.521,7.036 47.791,5.766 47.791,5.756 48.493,5.055 48.503,5.055 49.967,3.59 J1.0.3
SWCLK: P1.0.4 U1.49 | length 37.3
  Top Layer w0.3: P1.0.4 33.3,83.708 34.292,84.7 37.9,84.7 38.75,83.85 38.75,80.598 38.745,80.592 38.745,79.885 38.75,79.879 U1.49
SWDIO: P1.0.2 U1.50 | length 34.4
  Top Layer w0.3: P1.0.2 31.8,83.7 31.1,83 31.1,78.9 38.25,71.75 U1.50
SWO: P1.0.6 U1.51 | length 39.4
  Top Layer w0.3: v1(33.4,85.1) 31.622,85.1 30.6,84.078 30.6,78.693 37.75,71.543 U1.51
  Bottom Layer w0.3: v1(33.4,85.1) 34.57,83.93 P1.0.6
THR0: J1.0.5 U1.31 | length 44
  Top Layer w0.203: U1.31 38.25,40.693 48.385,30.558 48.385,9.828 46.406,7.849 46.406,7.152 47.791,5.766 47.791,5.756 48.306,5.241 48.316,5.241 48.67,4.887 J1.0.5
THR1: J1.0.6 U1.21 | length 47.7
  Top Layer w0.203: U1.21 33.25,40.689 33.528,40.411 33.528,39.789 32.453,38.714 30.962,38.714 29.286,37.038 29.286,23.52 v2(43.383,9.423)
  Bottom Layer w0.203: v2(43.383,9.423) 43.981,8.825 43.981,7.036 44.496,6.521 44.496,6.511 46.148,4.86 J1.0.6
THR2: J1.0.7 U1.29 | length 45.8
  Top Layer w0.203: U1.29 37.25,40.398 47.579,30.069 47.579,11.561 43.981,7.964 43.981,6.971 44.469,6.484 44.469,5.756 43.981,5.269 43.981,4.496 44.887,3.59 J1.0.7
THR3: J1.0.8 U1.30 | length 42.3
  Top Layer w0.203: U1.30 37.75,40.558 47.982,30.326 47.982,9.995 46.003,8.016 46.003,7.268 45.085,6.35 45.085,5.085 J1.0.8
THR4: J1.0.9 U1.17 | length 46.2
  Top Layer w0.203: U1.17 31.242,41.617 31.242,40.818 28.48,38.056 28.48,18.567 38.706,8.341 38.706,7.218 42.333,3.59 J1.0.9
THR5: J1.0.10 U1.18 | length 43.5
  Top Layer w0.203: U1.18 31.75,40.756 28.883,37.889 28.883,19.555 42.32,6.118 J1.0.10
THR6: J1.0.11 U1.15 | length 48
  Top Layer w0.203: U1.15 28.521,43.95 27.673,43.103 27.673,18 37.754,7.919 37.754,5.395 39.559,3.59 J1.0.11
THR7: J1.0.12 U1.16 | length 44.5
  Top Layer w0.203: U1.16 28.591,43.45 28.077,42.936 28.077,18.331 38.254,8.154 38.254,6.386 J1.0.12
Tx1: J1.0.16 U1.34 | length 41
  Top Layer w0.203: U1.34 41.572,43.95 49.94,35.582 J1.0.16
Tx2: J1.0.18 U1.10 | length 51.3
  Top Layer w0.203: U1.10 35.631,46.45 48.788,33.293 48.788,8.788 J1.0.18
VCC: C_AVDD.2 C_AVDD_0.1 C_AVDD_1.1 C_IOVDD.2 C_IOVDD_3.2 C_IOVDD_5.2 C_IVDD_0.2 C_VDD1.2 C_VDD.2 J1.0.P2B P1.0.1 R_LED.2 S1.3 S1.4 U1.7 U1.23 U1.26 U1.27 U1.39 U1.55 | length 53.9
  Top Layer w0.203: C_IVDD_0.2 27.35,47.95 U1.7 ; U1.26 U1.27 ; v1(35.75,51.15) U1.55 35.75,54.904 36.309,55.463 C_IOVDD_5.2
  Top Layer w0.3: C_AVDD.2 31.896,37.518 33.289,38.911 33.806,39.429 33.841,39.429 34.25,39.838 U1.23 ; U1.27 36.25,40.128 37.904,38.474 C_AVDD_0.1 ; U1.39 42.526,46.45 v3(43.38,45.596)
  Top Layer w0.508: v3(5.35,71.314) S1.4 S1.3 ; v3(25.107,48.5) C_IVDD_0.2 ; v3(30.399,36.8) C_AVDD.2 ; C_AVDD_0.1 38.713,36.7 v3(39.599,35.814) ; v3(43.38,45.596) C_VDD.2 ; v3(60.539,84.313) R_LED.2
  Bottom Layer w0.508: C_IOVDD.2 C_VDD1.2 35.75,48.754 v1(35.75,51.15) ; C_AVDD_1.1 C_IOVDD_3.2 38.713,36.7 v3(39.599,35.814)
pads on no net: J1.0.P1A J1.0.P2A P1.0.7 P1.0.8 P1.0.9 U1.1.1 U1.1.2 U1.1.3 U1.1.4 U1.1.5 U1.1.6 U1.1.7 U1.1.8 U1.1.9 U1.1.10 U1.1.11 U1.1.12 U1.1.13 U1.1.14 U1.1.15 U1.1.16 U1.1.17 U1.1.18 U1.5 U1.6 U1.32 U1.33 U1.36 U1.37 U1.38 U1.41 U1.42 U1.43 U1.44 U1.45 U1.46 U1.47 U1.48 U1.52 U1.54 U1.57 U1.58 U1.59 U1.60 U1.61 U1.62 U1.64
copper on no net: | length 673.3
  Top Layer w0.203: 5.378,44.469 5.944,45.034 8.453,45.034 9.992,46.573 18.677,55.258 31.213,55.258 32.25,54.22 32.25,52.775 ; 5.436,46.99 5.495,46.99 5.661,47.156 5.841,47.335 9.614,47.335 18.343,56.064 31.67,56.064 33.75,53.984 33.75,52.775 ; 5.62,48.127 6.008,47.739 9.447,47.739 18.176,56.467 31.837,56.467 34.25,54.054 34.25,52.775 ; 8.248,46.679 9.527,46.679 18.51,55.661 31.38,55.661 32.647,54.393 33.187,53.854 33.187,52.838 33.25,52.775 ; 8.345,48.666 9.804,48.666 18.009,56.871 32.004,56.871 34.75,54.125 34.75,52.775 ; 31.25,52.775 31.25,53.434 ; 32.75,52.775 32.783,52.808 ; v2@37.033,54.483 37.084,54.432 37.25,54.266 37.25,52.775 ; 38.75,41.625 46.72,33.655 v1(46.838,33.537) ; 40.575,43.45 48.643,35.382 v1(48.666,35.382) ; 40.575,44.95 41.842,44.95 43.866,42.926 46.939,42.926 v1(46.965,42.901) ; 40.575,45.45 42.053,45.45 43.485,44.018 46.304,44.018 v1(46.33,44.044) ; 40.575,47.95 41.981,47.95 42.24,48.209 42.266,48.184 v1(42.266,48.133) ; 40.575,48.95 43.464,48.95 44.78,50.267 v1(44.78,50.343) ; 40.575,49.45 42.617,49.45 v1(43.536,50.368) ; 40.575,50.45 42.133,50.45 v1(42.139,50.444)
  Bottom Layer w0.203: 5.289,57.906 5.598,57.598 13.751,57.598 16.767,60.614 39.279,60.614 46.965,52.928 46.965,46.116 46.84,45.992 46.84,45.2 47.135,44.905 47.135,43.071 v1(46.965,42.901) ; 5.493,53.08 5.918,52.654 11.088,52.654 17.435,59.001 38.611,59.001 43.536,54.077 v1(43.536,50.368) ; 5.531,50.578 6.223,49.886 10.262,49.886 17.856,57.48 33.249,57.48 35.001,55.728 35.789,55.728 v2@37.033,54.483 ; 5.581,55.531 6.028,55.084 12.378,55.084 15.739,58.445 17.101,59.807 38.945,59.807 45.586,53.167 45.586,50.009 43.815,48.238 43.815,48.158 42.291,48.158 v1(42.266,48.133) ; 8.345,53.619 11.483,53.619 17.268,59.404 38.778,59.404 44.78,53.402 v1(44.78,50.343) ; 8.36,56.22 12.944,56.22 16.934,60.211 39.112,60.211 46.33,52.993 v1(46.33,44.044) ; 8.395,51.206 10.211,51.206 17.602,58.598 38.252,58.598 43.002,53.848 43.002,51.308 v1(42.139,50.444) ; 8.418,61.42 16.71,61.42 39.613,61.42 49.53,51.503 49.53,33.934 49.133,33.537 v1(46.838,33.537) ; 8.577,58.619 14.202,58.619 16.6,61.017 39.446,61.017 48.751,51.712 48.751,48.759 48.751,35.467 v1(48.666,35.382)
  other v2: 36.932,54.661

## Polygon pours and split planes (outlines as drawn)
GND on Ground Plane (split plane): 69.49,0.51 0.51,0.51 0.51,89.49 69.49,89.49
VCC on Power Plane (split plane): 69.49,0.51 0.51,0.51 0.51,89.49 69.49,89.49

## Silkscreen, mask and mechanical layers (free items; w line width, h text height)
Top Overlay:
  text "Vortex 2018" at 4,4.8 h1.52 r90
Mechanical 1:
  lines w0.1: 69.8,-0.1 69.8,89.9 ; 70,0 0,0 0,90 70,90

## Text inside footprints (layer, text, board x,y; h text height)
U1.1: Top Overlay "18" at 6.858,39.065 h1.27 r270; Top Overlay "9" at 4.318,39.065 h1.27 r270; Top Overlay "1" at 4.318,64.465 h1.27 r270; Top Overlay "10" at 6.858,64.973 h1.27 r270